# Altium PCB sten_for_works.PcbDoc (part 2 of 2)
Units mm, origin at the board's own origin, x right, y up, seen from the top; angles counter-clockwise.
Board outline 187.3 x 121.8 mm, 2 copper layers (Top Layer, Bottom Layer); 168 components, 126 nets, 634 pads, 474 vias.
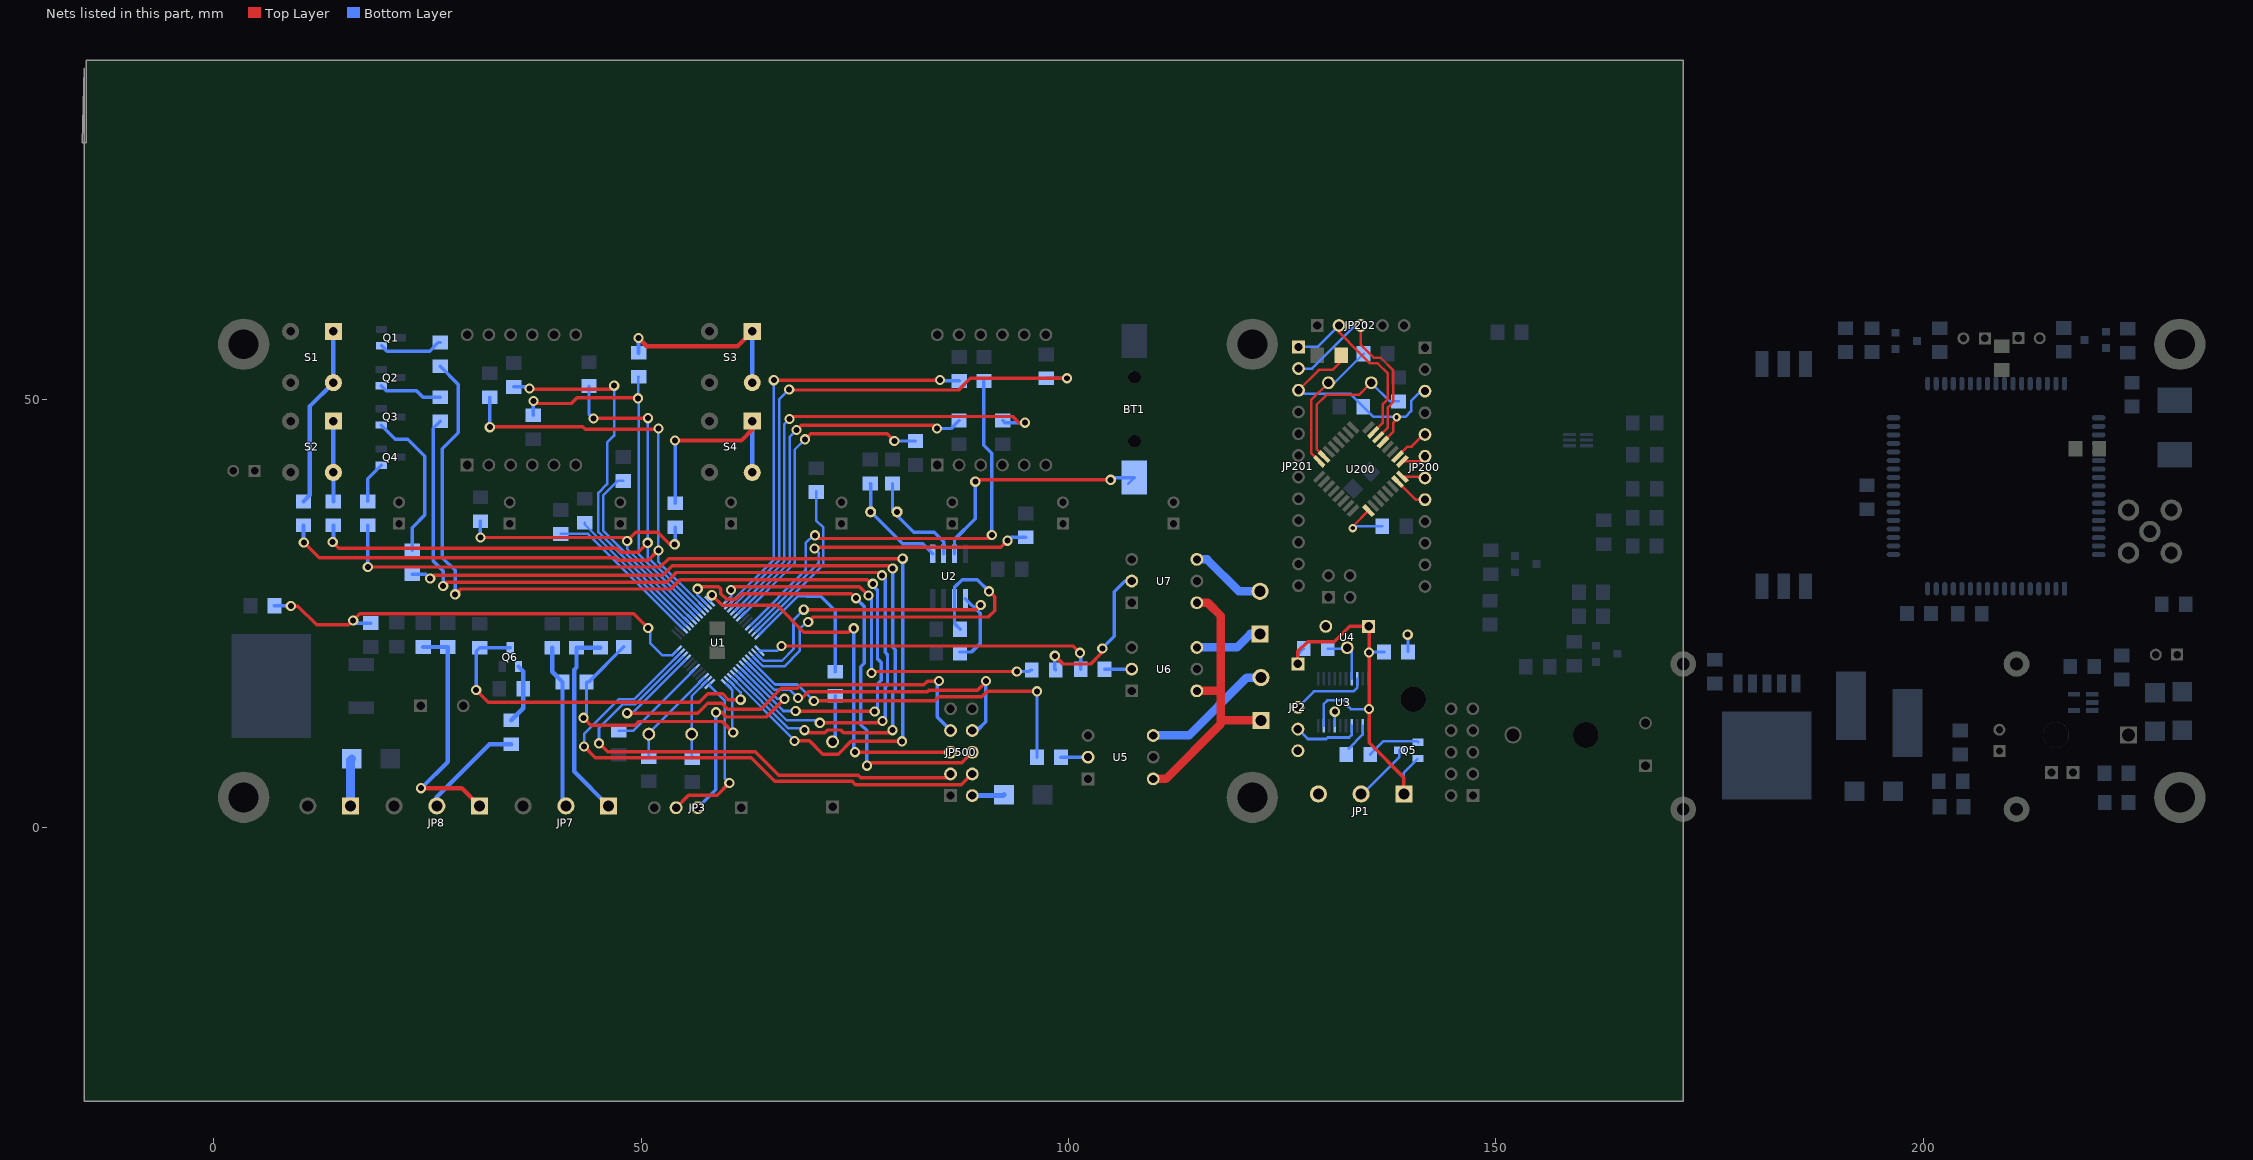
[diagram p2: the nets of this part, all layers, seen from the top]

## Via types
v1: diameter 1.2, hole 0.7, Top Layer to Bottom Layer, 255 vias
v2: diameter 1.1, hole 0.6, Top Layer to Bottom Layer, 197 vias
v3: diameter 1, hole 0.5, Top Layer to Bottom Layer, 19 vias
v4: diameter 1.5, hole 1, Top Layer to Bottom Layer, 3 vias

## Nets (pads, with @x,y where several pads share a name; then routed paths per layer and width w, separated by ;. In a path a pad name is that pad's centre, name@x,y a point inside that pad or via, vN(x,y) a via of type N, cw(c..) or ccw(c..) an arc to the next point about the centre after c; other vN are vias at no path point) (continued)
IO13_: R201.2 U200.17 | length 6.3
  Top Layer w0.3: v3(133.25,35) 133.25,35.197 U200.17@135.092,37.039
  Bottom Layer w0.3: v3(133.25,35) 133.443,35.193 R201.2@136.712,35.193
NetA1_2: A1.2 R39.1 | length 5.5
  Bottom Layer w0.4: A1.2@72.4,10.01 72.693,10.303 R39.1@72.693,15.388
NetBT1_1: BT1.1 U2.3 | length 29.3
  Top Layer w0.4: v1(89.1,40.425) 89.325,40.65 v1(104.925,40.65)
  Bottom Layer w0.3: BT1.1@106.975,40.175 BT1.1@107.7,40.9
  Bottom Layer w0.4: U2.3@86.66,32 86.66,33.66 89.1,36.1 v1(89.1,40.425) ; v1(104.925,40.65) 105.175,40.9 BT1.1@107.7,40.9
NetC1_2: C1.2 U2.1 Y1.1 | length 12.6
  Bottom Layer w0.4: C1.2@76.807,40.212 76.85,40.169 Y1.1@76.85,36.9 80.6,33.15 82.97,33.15 U2.1@84.12,32
NetC2_2: C2.2 U2.2 Y1.2 | length 12.1
  Bottom Layer w0.4: C2.2@79.407,40.212 79.407,36.993 79.95,36.45 81.9,34.5 84.275,34.5 85.39,33.385 U2.2@85.39,32
NetC3_1: C3.1 JP1.1 JP2.1 Q5.2 R23.1 U3.9 U4.1 | length 50
  Top Layer w0.4: JP2.1@126.833,19.108 126.833,20.584 127.974,21.725 131.099,21.725 132.874,23.5 135.424,23.5 135.174,23.25 135.174,9.875 139.225,5.824 JP1.1@139.225,3.899
  Bottom Layer w0.3: JP2.1@126.833,19.108 126.833,20.228 R23.1@127.511,20.907 ; U3.9@129.857,11.857 129.857,14.434 130.274,14.85 132.399,14.85 132.749,14.5 132.749,14.1 133.024,13.825 v1(135.149,13.825) ; JP1.1@139.225,3.899 139.225,6.4 Q5.2@140.8,7.975
  Bottom Layer w0.4: v1(135.149,20.45) 135.205,20.507 C3.1@136.911,20.507
NetC3_2: C3.2 JP1.3 JP2.5 U3.7 U4.3 | length 3.7
  Bottom Layer w0.3: v1(131.149,13.525) 131.157,13.516 U3.7@131.157,11.857 ; v1(139.674,22.525) 139.711,22.487 C3.2@139.711,20.507
NetC10_1: C10.1 JP7.1 R28.1 | length 23.1
  Bottom Layer w0.5: C10.1@45.243,21.013 R28.1@42.443,21.013 42.443,18.693 42.175,18.425 42.175,6.525 JP7.1@46.201,2.499
NetC11_1: C11.1 JP8.1 R31.1 | length 28.5
  Top Layer w0.5: v1(24.25,4.575) 29.025,4.575 JP8.1@31.101,2.499
  Bottom Layer w0.5: v1(24.25,4.575) 24.3,4.575 27.393,7.668 R31.1@27.393,21.088 C11.1@24.493,21.088
NetC14_2: C14.2 U1.6 | length 11.9
  Bottom Layer w0.3: C14.2@47.393,11.288 49.041,11.288 U1.6@56.278,18.524
NetD1_1: D1.1 JP4.1 | length 5.5
  Bottom Layer w1: JP4.1@16.006,2.508 16.006,7.857 D1.1@16.148,7.999
NetD3_1: D3.1 JP500.2 | length 3.8
  Bottom Layer w0.6: JP500.2@88.74,3.7 92.35,3.7 D3.1@92.45,3.8
NetJP1_2: JP1.2 Q5.3 | length 7.3
  Bottom Layer w0.3: JP1.2@134.426,4.1 JP1.2@134.225,3.899 134.399,3.899 138.702,8.202 Q5.3@138.702,8.998
NetJP2_3: JP2.3 U3.18 | length 8.9
  Bottom Layer w0.3: JP2.3@126.833,14.028 128.705,15.9 133.357,15.9 133.757,16.3 U3.18@133.757,17.357
NetJP2_4: JP2.4 U3.4 | length 8
  Bottom Layer w0.3: JP2.4@126.833,11.488 127.996,10.325 130.149,10.325 130.324,10.5 132.824,10.5 133.107,10.784 U3.4@133.107,11.857
NetJP5_1: JP5.1 U5.6 U6.6 U7.6 | length 34.2
  Top Layer w1: U5.6@109.91,5.66 111.385,5.66 117.825,12.1 117.825,24.725 116.29,26.26 U7.6@115.01,26.26 ; U6.6@115.01,15.96 117.76,15.96 117.825,16.025 ; 117.825,12.425 117.906,12.506 JP5.1@122.508,12.506
NetJP5_2: JP5.2 U5.4 | length 15.4
  Bottom Layer w1: U5.4@109.91,10.74 114.09,10.74 120.856,17.506 JP5.2@122.508,17.506
NetJP6_1: JP6.1 U6.4 | length 8
  Bottom Layer w1: U6.4@115.01,21.04 119.715,21.04 121.281,22.606 JP6.1@122.408,22.606
NetJP6_2: JP6.2 U7.4 | length 8.9
  Bottom Layer w1: U7.4@115.01,31.34 116.199,31.34 119.933,27.606 JP6.2@122.408,27.606
NetJP7_2: JP7.2 R29.2 R32.2 | length 19.2
  Bottom Layer w0.5: R29.2@39.607,21.012 39.607,18.199 R32.2@40.812,16.993 40.812,2.888 JP7.2@41.201,2.499
NetJP8_2: JP8.2 R33.2 | length 12.3
  Bottom Layer w0.5: JP8.2@26.101,2.499 26.101,3.551 32.262,9.712 R33.2@34.807,9.712
NetQ1_1: Q1.1 R1.1 | length 7.5
  Bottom Layer w0.4: Q1.1@19.648,56.326 20.273,55.7 25.275,55.7 26.287,56.712 R1.1@26.507,56.712
NetQ2_1: Q2.1 R2.1 | length 7.5
  Bottom Layer w0.4: Q2.1@19.606,51.652 20.182,51.075 23.725,51.075 24.488,50.312 R2.1@26.507,50.312
NetQ3_1: Q3.1 R3.1 | length 18.2
  Bottom Layer w0.4: Q3.1@19.598,47.052 21.249,45.4 22.725,45.4 24.7,43.425 24.7,36.525 23.207,35.032 R3.1@23.207,32.412
NetQ4_1: Q4.1 R4.1 | length 4.9
  Bottom Layer w0.4: R4.1@18.007,38.112 18.007,40.76 Q4.1@19.598,42.352
NetQ5_1: Q5.1 R24.2 | length 6.3
  Bottom Layer w0.3: R24.2@135.288,8.507 136.856,10.075 140.776,10.075 Q5.1@140.902,9.948
NetQ6_1: Q6.1 R33.1 R34.1 | length 7.1
  Bottom Layer w0.5: R33.1@34.807,12.512 36.212,13.918 36.212,18.234 Q6.1@35.648,18.798
NetR23_2: R23.2 U3.17 U4.2 | length 6.4
  Bottom Layer w0.3: R23.2@130.311,20.907 132.83,20.907 132.924,21 133.107,20.816 U3.17@133.107,17.357
NetR24_1: R24.1 U3.2 | length 3.3
  Bottom Layer w0.3: R24.1@132.786,9.212 134.407,10.834 U3.2@134.407,11.857
NetR25_1: R25.1 U5.2 | length 3.2
  Bottom Layer w0.4: R25.1@99.112,8.193 102.283,8.193 U5.2@102.29,8.2
NetR26_1: R26.1 U6.2 | length 3.2
  Bottom Layer w0.4: R26.1@104.212,18.493 107.383,18.493 U6.2@107.39,18.5
NetR27_1: R27.1 U7.2 | length 18.4
  Top Layer w0.4: v1(98.4,20.05) 99.35,19.1 102.575,19.1 103.95,20.475 v1(103.95,20.925)
  Bottom Layer w0.4: v1(98.4,20.05) 98.4,18.506 R27.1@98.512,18.393 ; v1(103.95,20.925) 105.35,22.325 105.35,27.55 106.6,28.8 U7.2@107.39,28.8
NetR35_1: R35.1 S1.1 | length 21.3
  Bottom Layer w0.5: R35.1@10.507,38.112 11.225,38.831 11.225,49.235 S1.1@13.999,52.009 S1.1@13.999,58.009
NetR36_1: R36.1 S2.1 | length 9.4
  Bottom Layer w0.5: S2.1@13.999,47.509 S2.1@13.999,41.509 14.007,41.501 R36.1@14.007,38.112
NetR37_1: R37.1 S3.1 | length 22.1
  Top Layer w0.5: v1(49.707,57.232) 50.663,56.275 61.265,56.275 S3.1@62.999,58.009
  Bottom Layer w0.5: R37.1@49.707,55.512 v1(49.707,57.232) ; S3.1@62.999,52.009 S3.1@62.999,58.009
NetR38_1: R38.1 S4.1 | length 23.9
  Top Layer w0.5: v1(53.975,45.25) 61.725,45.25 62.999,46.524 S4.1@62.999,47.509
  Bottom Layer w0.4: v1(53.975,45.25) 54.007,45.218 R38.1@54.007,37.912
  Bottom Layer w0.5: S4.1@62.999,41.509 S4.1@62.999,47.509
PA3: JP500.7 U1.9 | length 54.6
  Top Layer w0.4: v1(48.375,13.35) 56.625,13.35 57.8,14.525 59.45,14.525 60.15,13.825 63.975,13.825 66.4,16.25 68.275,16.25 68.699,16.674 83.074,16.674 83.5,17.1 v1(84.85,17.1)
  Bottom Layer w0.3: v1(48.375,13.35) 48.982,13.35 U1.9@55.217,19.585
  Bottom Layer w0.4: v1(84.85,17.1) 84.625,16.875 84.625,12.895 JP500.7@86.2,11.32
PA4: JP500.3 U1.10 | length 58
  Top Layer w0.4: v1(45.075,9.825) 46.075,8.825 63.375,8.825 64.996,7.204 66.125,6.075 75.4,6.075 75.7,5.775 85.735,5.775 JP500.3@86.2,6.24
  Bottom Layer w0.3: v1(45.075,9.825) 45.075,11.6 47.85,14.375 49.3,14.375 U1.10@54.863,19.938
PA5: JP500.4 U1.11 | length 64.3
  Top Layer w0.4: v1(43.325,9.45) 44.65,8.125 62.9,8.125 65.65,5.375 74.675,5.375 75.075,4.975 87.475,4.975 JP500.4@88.74,6.24
  Bottom Layer w0.3: v1(43.325,9.45) 43.325,10.925 47.4,15 49.218,15 U1.11@54.51,20.292
PA6: D4.2 R40.2 U1.12 | length 53.8
  Top Layer w0.4: v1(9.025,25.875) 9.85,25.875 12.05,23.675 15.8,23.675 17.1,24.975 49.15,24.975 v1(50.825,23.3)
  Bottom Layer w0.3: v1(50.825,23.3) 51.05,23.075 51.05,21.575 52.525,20.1 53.611,20.1 U1.12@54.156,20.645
  Bottom Layer w0.4: D4.2@7.105,25.891 9.009,25.891 v1(9.025,25.875) ; v1(16.325,24.2) 16.637,23.888 R40.2@18.393,23.888
PB0: R5.2 R35.2 U1.22 | length 91.3
  Top Layer w0.4: v1(10.55,33.325) 12.35,31.525 47,31.525 47.275,31.25 50.85,31.25 51.975,32.375 v1(52.025,32.375) ; v1(32.307,46.807) 32.375,46.875 43.175,46.875 43.475,46.575 51.95,46.575 v1(52.025,46.65)
  Bottom Layer w0.3: v1(52.025,46.65) 52.025,31.05 U1.22@57.338,25.737
  Bottom Layer w0.4: v1(32.307,46.807) R5.2@32.307,50.312
  Bottom Layer w0.5: R35.2@10.507,35.312 10.507,33.368 v1(10.55,33.325)
PB1: R6.2 R36.2 U1.21 | length 75.2
  Top Layer w0.4: v1(13.925,33.375) 14.65,32.65 47.125,32.65 47.625,32.15 49.65,32.15 v1(50.775,33.275) ; v1(44.425,47.825) 50.775,47.825 v1(50.8,47.85)
  Bottom Layer w0.3: v1(50.8,47.85) 50.8,31.568 U1.21@56.985,25.383
  Bottom Layer w0.4: R6.2@43.907,51.612 43.907,48.343 v1(44.425,47.825)
  Bottom Layer w0.5: v1(13.925,33.375) 14.007,33.457 R36.2@14.007,35.312
PB2: R7.2 R37.2 U1.20 | length 45
  Top Layer w0.4: v1(37.425,49.875) 37.725,49.575 41.825,49.575 42.5,50.25 49.575,50.25 v1(49.65,50.175)
  Bottom Layer w0.3: R37.2@49.707,52.712 49.65,52.656 v1(49.65,50.175) 49.7,50.125 49.7,31.961 U1.20@56.631,25.029
  Bottom Layer w0.4: R7.2@37.393,48.188 37.393,49.843 v1(37.425,49.875)
PB3: R8.2 R38.2 U1.19 | length 39.9
  Top Layer w0.4: v1(31.225,33.9) 47.975,33.9 v1(48.375,33.5) 49.375,34.5 51.95,34.5 53.35,33.1 v1(53.925,33.1)
  Bottom Layer w0.3: v1(48.375,33.5) 48.375,32.579 U1.19@56.278,24.676
  Bottom Layer w0.4: R8.2@31.207,35.812 31.207,33.918 v1(31.225,33.9) ; v1(53.925,33.1) 54.007,33.182 R38.2@54.007,35.112
PB4: R9.2 U1.18 | length 21.9
  Bottom Layer w0.3: R9.2@47.907,40.512 47.237,40.512 45.55,38.825 45.55,34.696 U1.18@55.924,24.322
PB5: R10.2 U1.17 | length 44.8
  Top Layer w0.4: v1(36.95,51.325) 37.025,51.25 46.45,51.25 v1(46.85,51.65)
  Bottom Layer w0.3: v1(46.85,51.65) 46.85,45.825 46.025,45 46.025,40.15 45,39.125 45,34.539 U1.17@55.571,23.969
  Bottom Layer w0.4: R10.2@35.107,51.512 36.763,51.512 v1(36.95,51.325)
PB6: R11.2 U1.16 | length 16.9
  Bottom Layer w0.3: R11.2@43.407,35.612 43.407,35.426 U1.16@55.217,23.615
PB7: R12.2 U1.15 | length 18.8
  Bottom Layer w0.3: R12.2@40.607,34.312 43.813,34.312 U1.15@54.863,23.262
PC0: R13.2 U1.26 | length 50.1
  Top Layer w0.4: v1(65.525,52.3) 84.95,52.3 v1(84.975,52.325)
  Bottom Layer w0.3: U1.26@60.308,26.09 65.525,31.307 v1(65.525,52.3) ; v1(84.975,52.325) v1@85.088,52.212
  Bottom Layer w0.4: v1@85.088,52.212 R13.2@87.207,52.212
PC0A: JP200.8 U200.23 | length 4.3
  Top Layer w0.3: U200.23@138.486,40.433 140.6,38.32 JP200.8@141.9,38.32
PC1: R14.2 U1.27 | length 63.7
  Top Layer w0.4: v1(67.325,51.2) 67.375,51.15 87.15,51.15 88.525,52.525 v1(99.825,52.525)
  Bottom Layer w0.3: U1.27@60.662,25.737 66.15,31.225 66.15,50.025 v1(67.325,51.2)
  Bottom Layer w0.4: R14.2@97.407,52.512 97.419,52.525 v1(99.825,52.525)
PC1A: JP200.7 U200.24 | length 2.9
  Top Layer w0.3: U200.24@139.052,40.999 141.761,40.999 JP200.7@141.9,40.86
PC2: R17.2 U1.28 | length 55.7
  Top Layer w0.4: v1(67.35,47.75) 67.65,48.05 93.475,48.05 94.2,47.325 v1(94.9,47.325)
  Bottom Layer w0.3: U1.28@61.015,25.383 66.75,31.118 66.75,47.15 v1(67.35,47.75)
  Bottom Layer w0.4: R17.2@92.293,47.588 92.556,47.325 v1(94.9,47.325)
PC2A: JP200.6 U200.25 | length 3.1
  Top Layer w0.3: U200.25@139.052,42.802 141.302,42.802 JP200.6@141.9,43.4
PC3: R18.2 U1.29 | length 44.1
  Top Layer w0.4: v1(68.175,46.475) 68.725,47.025 84.25,47.025 v1(84.625,46.65)
  Bottom Layer w0.3: U1.29@61.369,25.029 67.4,31.061 67.4,45.7 v1(68.175,46.475)
  Bottom Layer w0.4: v1(84.625,46.65) 86.256,46.65 R18.2@87.193,47.588
PC3A: JP200.5 U200.26 | length 4.5
  Top Layer w0.3: U200.26@138.486,43.368 139.643,44.525 140.125,44.525 141.54,45.94 JP200.5@141.9,45.94
PC4: R19.2 U1.30 | length 37.3
  Top Layer w0.4: v1(69.175,45.375) 69.825,46.025 78.775,46.025 v1(79.625,45.175)
  Bottom Layer w0.3: U1.30@61.722,24.676 67.975,30.929 67.975,44.175 v1(69.175,45.375)
  Bottom Layer w0.4: v1(79.625,45.175) 79.638,45.188 R19.2@82.093,45.188
PC5: R20.2 U1.33 | length 53.2
  Top Layer w0.4: v1(70.35,34.15) 70.725,33.775 90.6,33.775 v1(91.025,34.2)
  Bottom Layer w0.3: U1.33@62.783,23.615 69.25,30.082 69.25,33.25 70.15,34.15 v1(70.35,34.15)
  Bottom Layer w0.4: R20.2@90.107,52.212 90.107,44.693 91.025,43.775 v1(91.025,34.2)
PC6: R21.2 U1.34 | length 38
  Top Layer w0.4: v1(70.275,32.6) 70.425,32.75 92.075,32.75 v1(92.85,33.525)
  Bottom Layer w0.3: U1.34@63.137,23.262 70.775,30.9 70.775,32.1 v1(70.275,32.6)
  Bottom Layer w0.4: v1(92.85,33.525) 93.237,33.912 R21.2@95.007,33.912
PD0: JP500.8 U1.41 | length 37.3
  Top Layer w0.4: v1(68.36,15.115) 68.79,15.115 69.55,15.875 83.5,15.875 83.65,16.025 89.35,16.025 90.35,17.025 v1(90.35,17.1)
  Bottom Layer w0.3: U1.41@62.429,19.231 65.561,16.1 67.375,16.1 v1(68.36,15.115)
  Bottom Layer w0.4: JP500.8@88.74,11.32 89.295,11.32 90.325,12.35 90.325,17.075 v1(90.35,17.1)
PD1: JP3.3 U1.42 | length 27.6
  Top Layer w0.4: v1@58.825,13.525 v1(58.75,13.45) 59.425,13.45 59.975,12.9 64.65,12.9 v1(66.775,15.025)
  Bottom Layer w0.3: U1.42@62.076,18.878 65.929,15.025 v1(66.775,15.025)
  Bottom Layer w0.4: JP3.3@56.628,2.291 58.75,4.413 v1(58.75,13.45)
PD2: R1.2 U1.43 | length 111.9
  Top Layer w0.4: v1(28.25,27.25) 28.875,27.875 53.475,27.875 54.55,28.95 76.45,28.95 v1@77,28.4 ; v1(68.075,13.6) 68.125,13.55 v1(77.325,13.55)
  Bottom Layer w0.3: U1.43@61.722,18.524 66.646,13.6 v1(68.075,13.6)
  Bottom Layer w0.4: R1.2@26.507,53.912 28.625,51.794 28.625,46.175 26.75,44.3 26.75,31.55 28.25,30.05 v1(28.25,27.25) ; v1@77,28.4 77.65,27.75 77.65,19.7 78.075,19.275 78.075,17.175 77.65,16.75 77.65,13.875 v1(77.325,13.55)
  other v1: 77.1,28.475
PD3: R2.2 U1.44 | length 109.2
  Top Layer w0.4: v1(26.85,28.225) 27.275,28.65 52.975,28.65 54.125,29.8 77.85,29.8 v1(78.175,29.475) ; v1(70.9,12.225) 78.05,12.225 v1(78.25,12.425)
  Bottom Layer w0.3: U1.44@61.369,18.171 67.039,12.5 v1@70.625,12.5
  Bottom Layer w0.4: R2.2@26.507,47.512 25.675,46.681 25.675,31.15 26.85,29.975 v1(26.85,28.225) ; v1@70.625,12.5 v1(70.9,12.225) ; v1(78.175,29.475) 78.55,29.1 78.55,20.45 78.825,20.175 78.825,16.675 78.55,16.4 78.55,12.7 78.275,12.425 v1(78.25,12.425)
PD4: R3.2 U1.45 | length 98
  Top Layer w0.4: v1(25.325,29.1) 25.725,29.5 52.55,29.5 53.65,30.6 79.1,30.6 v1(79.425,30.275) ; v1(69.1,11.35) 69.4,11.05 71.5,11.05 71.825,11.375 73.35,11.375 73.675,11.05 79.1,11.05 v1(79.4,11.35)
  Bottom Layer w0.3: U1.45@61.015,17.817 67.257,11.575 68.875,11.575 v1(69.1,11.35)
  Bottom Layer w0.4: R3.2@23.207,29.612 24.813,29.612 v1(25.325,29.1) ; v1(79.4,11.35) 79.425,11.375 79.425,15.725 79.725,16.025 79.725,20.75 79.425,21.05 v1(79.425,30.275)
PD5: R4.2 U1.46 | length 113.5
  Top Layer w0.4: v1(18.025,30.45) 52.25,30.45 53.225,31.425 v1(80.6,31.425) ; v1@68,10.05 v1(67.95,10.1) 69.7,10.1 71.25,8.55 73.05,8.55 74.55,10.05 v1(80.525,10.05)
  Bottom Layer w0.3: U1.46@60.662,17.463 67.95,10.175 v1(67.95,10.1)
  Bottom Layer w0.4: R4.2@18.007,35.312 18.007,30.468 v1(18.025,30.45) ; v1(80.525,10.05) 80.6,10.125 v1(80.6,31.425)
PD6: Q6.3 R30.2 U1.47 | length 43.7
  Top Layer w0.4: v1(30.7,16.05) 32.125,14.625 56.8,14.625 57.775,15.6 59.525,15.6 60.2,14.925 v1(61.65,14.925)
  Bottom Layer w0.3: U1.47@60.308,17.11 61.65,15.768 v1(61.65,14.925)
  Bottom Layer w0.4: v1(30.7,16.05) 30.7,20.606 R30.2@31.107,21.012 31.121,20.998 Q6.3@34.698,20.998
PD7: D2.2 R32.1 U1.48 | length 35
  Top Layer w0.4: v1(43.275,12.8) 44.125,11.95 49.3,11.95 49.725,12.375 59.475,12.375 v1(60.775,11.075)
  Bottom Layer w0.3: U1.48@59.955,16.756 60.65,16.061 60.65,11.2 v1(60.775,11.075)
  Bottom Layer w0.4: v1(43.275,12.8) 43.612,13.137 R32.1@43.612,16.993 43.889,16.993 D2.2@47.991,21.095
PE0: R25.2 U1.40 | length 43.9
  Top Layer w0.4: v1(70.2,14.775) 70.125,14.775 70.15,14.8 84.35,14.8 84.8,15.25 89.825,15.25 90.475,15.9 v1(96.325,15.9)
  Bottom Layer w0.3: U1.40@62.783,19.585 65.668,16.7 68.275,16.7 v1(70.2,14.775)
  Bottom Layer w0.4: R25.2@96.312,8.193 96.312,15.887 v1(96.325,15.9)
PE1: R15.2 U1.39 U2.6 | length 45.5
  Top Layer w0.4: v1(69.55,24) 70.15,24.6 90.625,24.6 91.35,25.325 91.35,26.95 v1(90.7,27.6)
  Bottom Layer w0.3: U1.39@63.137,19.938 64.25,18.825 66.75,18.825 68.55,20.625 68.55,23.175 69.375,24 v1(69.55,24)
  Bottom Layer w0.4: R15.2@87.313,23.182 86.66,23.834 86.66,28.06 87.575,28.975 89.325,28.975 v1(90.7,27.6)
PE2: R16.2 U1.38 U2.5 | length 40.8
  Top Layer w0.4: v1(69.025,25.45) 89.175,25.45 v1(89.725,26)
  Bottom Layer w0.3: U1.38@63.49,20.292 64.307,19.475 66.45,19.475 67.825,20.85 67.825,24.25 v1(69.025,25.45)
  Bottom Layer w0.4: R16.2@87.275,20.5 88.65,20.5 89.65,21.5 89.65,25.03 U2.5@87.93,26.75 ; 89.219,25.461 89.219,25.494 v1(89.725,26)
PE3: R26.2 U1.37 | length 40
  Top Layer w0.4: v1(66.425,21.2) 100.55,21.2 v1(101.35,20.4)
  Bottom Layer w0.3: U1.37@63.844,20.645 65.87,20.645 v1(66.425,21.2)
  Bottom Layer w0.4: v1(101.35,20.4) 101.412,20.338 R26.2@101.412,18.493
PE5: R27.2 U1.25 | length 46.3
  Top Layer w0.4: v1(60.525,27.75) 60.925,28.15 75.55,28.15 76.45,27.25 v1(76.6,27.1) ; v1(76.95,18.05) 77.125,18.225 v1(93.95,18.225)
  Bottom Layer w0.3: U1.25@59.955,26.444 60.525,27.014 v1(60.525,27.75)
  Bottom Layer w0.4: v1(76.6,27.1) 76.95,26.75 v1(76.95,18.05) ; v1(93.95,18.225) 95.4,18.225 95.568,18.393 R27.2@95.712,18.393
PE6: JP500.5 U1.24 | length 45.7
  Top Layer w0.4: v1(58.275,27.15) 59.475,25.95 65.925,25.95 69.05,22.825 74.3,22.825 v1@75.025,23.55 ; v1@75,8.8 v1(75.02,8.78) JP500.5@86.2,8.78
  Bottom Layer w0.3: U1.24@58.045,26.444 58.275,26.673 v1(58.275,27.15)
  Bottom Layer w0.4: v1(75.02,8.78) 74.875,8.925 74.875,23.4 v1@75.025,23.55
  other v1: 74.875,23.275
PE7: JP500.6 U1.23 | length 55.8
  Top Layer w0.4: v1(56.625,27.9) 56.875,28.15 59.05,28.15 59.325,27.875 59.325,27.325 60,26.65 61.1,26.65 61.775,27.325 74.6,27.325 v1(75.125,26.8) ; v1(76.425,7.2) 76.775,7.55 87.51,7.55 JP500.6@88.74,8.78
  Bottom Layer w0.3: v1(56.625,27.9) 56.55,27.825 56.55,27.232 U1.23@57.692,26.09
  Bottom Layer w0.4: v1(75.125,26.8) 76.1,25.825 76.1,19.2 75.7,18.8 75.7,12 76.375,11.325 76.375,7.25 v1(76.425,7.2)
PG0: R22.2 U1.35 | length 20
  Bottom Layer w0.3: U1.35@63.49,22.908 71.325,30.743 71.325,35.05 70.475,35.9 R22.2@70.475,39.325
PG1: R39.2 U1.36 | length 18.5
  Bottom Layer w0.3: U1.36@63.844,22.555 68.289,27 69.375,27
  Bottom Layer w0.4: 69.375,27 71,27 72.693,25.307 R39.2@72.693,18.188
RESET: C202.1 JP200.3 JP201.3 R200.2 U200.29 | length 29.3
  Top Layer w0.3: JP201.3@126.9,51.12 129.28,53.5 130.875,53.5 131.912,54.537 C202.1@131.912,55.207 ; U200.29@136.789,45.065 137.975,46.251 137.975,47.275 138.325,47.625 138.325,47.9 v3(138.375,47.95)
  Bottom Layer w0.3: JP201.3@126.9,51.12 127.32,50.7 132.994,50.7 135.694,48 139.4,48 140.075,48.675 140.075,49.875 141.22,51.02 JP200.3@141.9,51.02 ; v3(138.375,47.95) 138.375,47.8 138.425,47.85 v3@138.425,48
RST: JP3.4 U1.1 | length 20
  Top Layer w0.4: JP3.4@54.088,2.291 55.547,3.75 58.9,3.75 v1(60.325,5.175)
  Bottom Layer w0.3: U1.1@58.045,16.756 58.045,16.505 59.8,14.75 59.8,5.7 v1(60.325,5.175)
RX: JP201.2 JP202.3 U200.30 | length 25.3
  Top Layer w0.3: JP202.3@134.18,58.7 134.18,56.47 135.35,55.3 135.725,54.925 136.525,54.925 138,53.45 138,49.775 137.35,49.125 137.35,46.757 U200.30@136.223,45.631
  Bottom Layer w0.3: JP201.2@126.9,53.66 128.485,53.66 133.475,58.65 JP202.3@134.3,58.65
TX: JP201.1 JP202.2 U200.31 | length 21.9
  Top Layer w0.3: JP202.2@131.64,58.7 131.64,57.91 133.99,55.56 135.275,54.275 136.175,54.275 137.35,53.1 137.35,50.075 136.75,49.475 136.75,47.289 U200.31@135.658,46.196
  Bottom Layer w0.3: JP201.1@126.9,56.2 129.14,56.2 JP202.2@131.64,58.7
XL1: C201.2 U200.7 Y200.2 | length 18
  Top Layer w0.3: U200.7@129.895,43.368 129.025,44.238 129.025,49.425 130.175,50.575 133.983,50.575 Y200.2@135.408,52
  Bottom Layer w0.3: Y200.2@135.408,52 137.596,49.812 C201.2@138.607,49.812
XL2: C200.2 U200.8 Y200.1 | length 15.9
  Top Layer w0.3: U200.8@129.329,42.802 128.375,43.756 128.375,49.967 Y200.1@130.408,52
  Bottom Layer w0.3: Y200.1@130.408,52 131.119,52 C200.2@134.512,55.393
XT1: C13.2 U1.2 Y2.2 | length 9.8
  Bottom Layer w0.3: C13.2@55.993,8.088 55.908,8.173 55.908,15.326 U1.2@57.692,17.11
XT2: C12.2 U1.3 Y2.1 | length 12
  Bottom Layer w0.3: C12.2@51.093,8.188 50.908,8.373 50.908,11.033 U1.3@57.338,17.463
pads on no net: B101.0 B101.1 B101.2 BT1.0 C1_1.1 C1_1.2 C102.1 C102.2 C103.1 C103.2 C104.1 C104.2 C105.1 C105.2 C106.1 C106.2 C107.1 C107.2 C108.1 C108.2 C109.1 C109.2 C110.1 C110.2 C111.1 C111.2 C112.1 C112.2 C113.1 C113.2 D100.1 D100.2 D102.1 D102.2 D104.1 D104.2 D105.1 D105.2 DS1_1.1 DS1_1.2 DS2_1.1 DS2_1.2 DS103.1 DS103.2 HG1.6 JP1.0 JP7.0 JP8.0 JP100.1 JP100.2 JP100.3 JP100.4 JP100.5 JP100.6 JP100.7 JP100.8 JP100.9 JP100.10 L101.1 L101.2 P1.1 P1.2 Q1_1.1 Q1_1.2 Q1_1.3 Q2_1.1 Q2_1.2 Q2_1.3 Q103.1 Q103.2 Q103.3 Q104.1 Q104.2 Q104.3 R4_1.1 R4_1.2 R5_1.1 R5_1.2 R6_1.1 R6_1.2 R7_1.1 R7_1.2 R10_1.1 R10_1.2 R11_1.1 R11_1.2 R101.1 R101.2 R102.1 R102.2 R103.1 R103.2 R108.1 R108.2 R109.1 R109.2 R112.1 R112.2 R113.1 R113.2 R114.1 R114.2 R115.1 R115.2 R116.1 R116.2 R117.1 R117.2 R118.1 R118.2 R119.1 R119.2 R120.1 R120.2 R121.1 R121.2 R122.1 R122.2 U2.7 U3.1 U3.3 U3.5 U3.6 U3.8 U3.10 U3.11 U3.12 U3.13 U3.14 U3.15 U3.16 U3.19 U3.20 U5.3 U5.5 U6.3 U6.5 U7.3 U7.5 U101.1 U101.2 U101.3 U101.4 U101.5 U101.6 U101.7 U101.8 U101.9 U101.10 U101.11 U101.12 U101.13 U101.14 U101.15 U101.16 U101.17 U101.18 U101.19 U101.20 U101.21 U101.22 U101.23 U101.24 U101.25 U101.26 U101.27 U101.28 U101.29 U101.30 U101.31 U101.32 U101.33 U101.34 U101.35 U101.36 U101.37 U101.38 U101.39 U101.40 U101.41 U101.42 U101.43 U101.44 U101.45 U101.46 U101.47 U101.48 U101.49 U101.50 U101.51 U101.52 U101.53 U101.54 U101.55 U101.56 U101.57 U101.58 U101.59 U101.60 U101.61 U101.62 U101.63 U101.64 U101.65 U101.66 U101.67 U101.68 U102.2 U102.3 U102.4 U102.5 U102.6 U102.7 U103.1 U103.2 U103.3 U103.4 U103.5 U104.1 U104.2 U104.3 U104.4 U104.5 U104.6 U105.1 U105.2 U105.3 U105.4 U200.20 VD101.1 VD101.2 VD101.3 VD101.4 VD101.5 VD101.6 X101.1 X102.1
copper on no net: | length 1423.8
  Top Layer w0.4: 147.3,11.32 148.65,12.67 v2(148.65,21.75) ; v2(150.25,13.65) v2(150.25,55.7) ; v2(155.025,8.7) 155.225,8.9 v2(155.225,55.625) ; v2(156.45,6.2) v2(156.45,24.725) ; v2(157.25,27.475) 157.725,27 157.725,23.975 157.5,23.75 157.5,7.025 v2(158.175,6.35) ; v2@158.475,43.025 158.475,42.225 159.475,41.225 v2(159.475,33.15) ; v2@161.225,29.7 161.225,48.225 v2(161.35,48.35) ; v2(167.375,21.45) 167.775,21.85 v2(167.775,28.025) ; v2(180.9,44.5) 181.075,44.675 v2(181.075,51.425) ; v2(183.6,48.125) 183.607,48.132 183.607,51.357 v2(183.66,51.41) ; v2(186.3,51.375) 186.3,33.95 v2(186.575,33.675) ; v2(188.937,58.388) 188.937,49.863 190.2,48.6 190.2,38.2 191.925,36.475 191.925,22.675 v2(191.275,22.025) ; v2(190.9,51.65) 190.9,52.825 193.875,55.8 196.6,55.8 v2(199.187,58.388) ; v2(192.275,51.025) 192.275,53.025 194.325,55.075 v2(198.975,55.075) ; v2(193.1,26.8) 193.725,26.175 v2(193.725,22.875) ; v2@221.675,33.875 221.725,33.825 221.725,22.35 v2(221.825,22.25) ; v2(222.4,58.275) 222.4,54.6 v2(226.2,50.8) ; v2@229.287,9.712 228.775,10.225 228.775,19.278 229.689,20.192
  Top Layer w0.6: 144.76,3.7 144.76,2.69 145.975,1.475 152,1.475 153.4,2.875 153.4,9.225 154.075,9.9 154.075,12.3 153.6,12.775 v2(153.6,57.525) ; v2(183.45,18.925) 189.5,18.925 190.8,17.625 190.8,2.3 v2(190.125,1.7) ; 209.182,56.288 v2@209.182,57.182 ; 220.588,44.293 222.293,44.293 222.925,44.925 222.925,52.9 221.85,53.975 v2(221.525,53.975)
  Bottom Layer w0.4: 144.76,6.24 146.02,7.5 157.025,7.5 v2(158.175,6.35) ; 144.76,8.78 146.03,10.05 148.775,10.05 150.25,11.525 v2(150.25,13.65) ; 144.76,11.32 146.05,12.61 146.05,17.868 146.975,18.793 153.487,18.793 ; 147.3,6.24 156.41,6.24 v2(156.45,6.2) ; 147.3,8.78 154.945,8.78 v2(155.025,8.7) ; v2(148.65,21.75) 149.307,22.407 149.307,23.712 ; 149.307,26.512 149.307,29.432 149.717,29.842 152.239,29.842 ; v2@150.25,55.75 153.125,55.75 154.475,54.4 155.975,54.4 156.175,54.6 171.4,54.6 176.75,49.25 190.5,49.25 v2(192.275,51.025) ; 154.739,30.792 163.508,30.792 166.275,28.025 v2(167.775,28.025) ; v2(155.225,55.625) 171.8,55.625 177.4,50.025 189.275,50.025 v2(190.9,51.65) ; 156.287,18.793 159.074,18.793 159.168,18.888 161.26,18.888 161.714,19.342 ; v2(156.45,24.725) 156.482,24.693 159.712,24.693 ; 156.675,45.4 156.775,45.3 158.6,45.3 ; v2(157.25,27.475) 159.694,27.475 159.712,27.493 ; v2(158.475,43) 158.475,44.625 ; 158.6,45.95 158.6,47.225 159.725,48.35 v2(161.35,48.35) ; v2(159.475,33.15) 162.35,33.15 162.593,32.907 165.988,32.907 165.95,32.869 165.95,31.625 166.725,30.85 173.375,30.85 176.2,33.675 v2(186.575,33.675) ; 160.6,44.65 161.3,44.65 162.357,43.593 166.012,43.593 166.012,42.663 166.775,41.9 170.05,41.9 171.025,42.875 171.025,43.3 172.225,44.5 v2(180.9,44.5) ; 160.6,45.95 161.5,45.95 162.843,47.293 166.012,47.293 166.012,48.912 166.65,49.55 170.2,49.55 171.9,47.85 183.25,47.85 183.5,48.1 183.575,48.1 v2(183.6,48.125) ; v2(161.15,29.7) 163.25,29.7 166.425,26.525 180.7,26.525 181.12,26.945 181.12,28.2 ; v2(161.225,39.55) 161.268,39.593 166.012,39.593 ; 162.512,24.693 162.594,24.775 193.3,24.775 194.705,23.37 196.725,21.35 206.425,21.35 208.5,23.425 208.5,27.9 ; 162.512,27.493 163.707,27.493 165.7,25.5 193.625,25.5 196.925,22.2 205.6,22.2 206.65,23.25 206.65,24.831 ; 164.214,20.292 167.922,24 192.6,24 v2(193.725,22.875) ; v2(167.375,21.45) 167.375,22.125 168.425,23.175 191.825,23.175 194.4,20.6 207.1,20.6 209.775,23.275 215.55,23.275 216.5,24.225 216.5,27.9 ; 168.675,43.55 169.275,43.55 171.625,45.9 196.5,45.9 ; 168.788,32.907 168.825,32.944 168.825,39.581 168.812,39.593 171.618,39.593 175.05,43.025 181.9,43.025 183.775,44.9 196.5,44.9 ; 168.812,47.293 169.206,46.9 196.5,46.9 ; 186.2,54.2 186.2,51.475 v2(186.3,51.375) ; v2(186.25,43.55) 186.6,43.9 196.5,43.9 ; v2(188.937,58.388) 190.893,58.388 ; 190.893,55.588 196.385,55.588 196.739,55.942 ; v2(191.275,22.025) 191.875,22.025 194.15,19.75 207.875,19.75 210.3,22.175 221.75,22.175 v2(221.825,22.25) ; v2(193.1,26.8) 193.425,26.8 197.2,23.025 198.906,23.025 200.875,24.994 ; v2(198.975,55.075) 199.35,55.075 200.35,56.075 200.35,56.475 200.85,56.975 203.2,56.975 203.475,57.25 203.475,58.1 204.075,58.7 216.319,58.7 216.607,58.412 217.757,58.412 219.261,56.908 ; 199.125,56.75 199.125,58.325 v2(199.187,58.388) 201.893,58.388 ; 201.893,55.588 203.084,55.588 204.689,57.192 ; 213.611,57.208 215.207,55.612 216.607,55.612 ; 220.5,33.875 v2@221.675,33.875 ; 220.5,47.9 223.094,47.9 224.407,49.212 ; 221.761,57.858 222.215,58.312 223.907,58.312 ; 224.407,52.107 224.407,52.012 224.988,52.012 v2(226.2,50.8)
  Bottom Layer w0.5: v2(181.075,51.425) 181.12,51.47 181.12,54.2 ; 183.4,16.825 183.4,18.975 v2(183.45,18.925) ; v2(183.66,51.41) 183.66,54.2 ; v2(190.125,1.7) 190.05,1.55 201.031,1.55 201.888,2.407 201.888,2.669 204.612,5.393 ; 193.393,39.988 193.481,39.9 196.5,39.9 ; 200.875,24.994 201.5,25.619 201.5,27.9 ; 202.5,27.9 202.5,26.506 204.012,24.993 ; 206.65,24.831 206.812,24.993 207.5,25.681 207.5,27.9 ; 217.188,18.807 217.188,15.987 217.625,15.55 ; 217.625,13.65 217.625,13.5 224.005,7.12 ; 218.8,41.425 219.325,40.9 221.45,40.9 222,41.45 ; 218.85,38.3 219.45,38.9 221.675,38.9 222.1,38.475 ; 219.775,13.65 219.775,13.2 222.175,10.8 223.5,10.8 ; 219.775,15.55 221.456,15.55 223.193,17.288 ; 223.193,20.088 223.298,20.192 227.189,20.192
  Bottom Layer w0.6: v2(153.6,57.525) 187.025,57.525 188.775,55.775 188.775,54.825 190.025,53.575 205.7,53.575 206.1,53.975 v2(221.525,53.975) ; 207.189,57.192 v2@209.16,57.192 ; 209.175,53.975 v2@209.175,57.182 ; v2@209.175,57.192 211.095,57.192 211.111,57.208 ; 220.5,39.9 225.275,39.9 226.5,38.675 226.5,34.6 ; 220.5,42.9 221.875,42.9 222.05,43.075 222.05,44.75 221.9,44.9 220.5,44.9 ; 220.5,43.9 222.05,43.9
  Bottom Layer w1: 180,16.825 180,21.525 180.5,22.025 186.475,22.025 187.125,21.375 187.125,17.95 191.225,13.85 191.825,13.85 191.825,4.25 ; 181.7,16.825 181.7,20.375 181.75,20.425 v4@185.075,20.425 ; v4(185.075,20.35) v4@185.15,20.425 ; 185.1,16.825 v4@185.1,20.35 ; 198.132,12.193 199.032,12.193 202.713,8.512 204.307,8.512 209.188,8.512 210.9,6.8 210.9,2.1 210.593,2.407 204.688,2.407 ; 210.9,6.2 211.112,6.412 215.005,6.412 ; 217.505,6.412 221.383,6.412 221.488,6.307 ; 221.825,44.2 222.175,44.2 v4@222.262,44.287 ; v4@222.55,44 228.85,44 231.4,41.45 231.4,16.547 230.301,15.448 ; 223.5,10.8 226.953,10.8 227.101,10.948 ; 224.005,2.891 224.005,6.307 ; 224.005,7.13 225.675,8.8 228.375,8.8 230.301,10.726 230.301,11.348 ; 227.101,15.448 230.398,15.448
  Bottom Layer w1.5: 147.3,3.7 163.994,3.7 167.493,7.199 169.699,7.199 ; 171.9,2.1 171.9,4.998 169.699,7.199 ; 177.975,16.875 175.975,16.875 175.759,16.659 173.2,14.1 173.2,10.7 169.699,7.199
  other v2: 154.5,1.5 154.5,1.5 158.45,1.5 163.45,1.5 178.5,2.425 168.475,2.5 183.5,2.5 188.5,2.5 219.575,2.5 215,2.525 199.2,3.375 181,4.95 186,4.975 175,5 207.5,5 199.175,6.8 173.5,7.45 188.5,7.45 178.5,7.475 195,7.475 183.45,7.5 161,7.525 220.5,8.35 229.237,9.662 186,9.975 165,10 174.95,10 181,10.025 218.1,10.55 183.5,12.475 178.45,12.5 188.475,12.5 194.975,12.5 202.475,12.5 207.5,12.5 212.5,12.525 225.525,13.3 232.125,13.6 222.1,13.825 151.9,14.925 205,14.975 165.95,15 169.9,15 210,15 215,15 160.95,15.1 160.95,15.1 195,17.225 168.35,17.5 207.5,17.5 202.5,17.525 226.65,18.3 177.9,19.575 215.025,20 218.55,20.9 189.05,21.9 176.05,22 152,22.45 146,22.475 227.475,22.5 164.1,22.675 225,25 220,25.025 210.4,25.15 214.6,25.25 146,27.45 195,27.475 151.925,27.5 190,27.5 172.75,29.2 175.575,29.2 157.6,29.375 189.05,29.4 225,29.975 200,30 230,30 183.6,31.075 186.8,31.15 178.4,31.75 146,32.45 202.5,32.475 194.35,32.5 217.5,32.525 171.9,32.925 157.15,33.6 221.9,33.9 189.1,34.375 148.5,34.95 175,35 180.025,35 199.975,35 215,35 152,37.475 146,37.5 172.025,37.5 177.5,37.5 182.55,37.5 202.45,37.5 163.35,38 157.2,38.725 189.05,39.5 148.425,40 175,40 180,40 184.85,40 200,40.025 205,40.025 210,40.025 163.45,41.4 224.2,41.975 183.375,42.3 193.3,42.325 146,42.475 207.5,42.475 212.5,42.475 151.925,42.5 172.5,42.525 202.5,42.55 148.45,45 200,45 205.025,45 210,45.025 215,45.025 163.5,45.25 225.3,46.525 212.5,47.475 217.5,47.475 145.975,47.5 152.025,47.5 202.525,47.5 207.5,47.525 192.325,48.6 158.475,49.5 163.5,49.55 148.45,50 230.075,50 172.9,51.075 187.8,51.525 195,52.05 221.45,52.1 160.9,52.175 166,52.175 177.5,52.3 145.975,52.5 151.975,52.5 148.45,55 212.55,55.3 205.825,55.5 179,55.525 174.975,55.6 209.16,57.182 146,57.475 175,58.65 170,58.675 185,58.675 180,58.7 164.25,58.8 159.2,58.825 154.8,58.875
  other v4: 181.75,20.325 222.925,44.525

## Polygon pours and split planes (outlines as drawn)
GND on Top Layer (hatched 90Degree grid 0.1 track 0.3, remove dead copper): -2.4,63.325 -2.4,-3.775 127.15,-3.775 127.15,62.95 -2.4,62.95
NetC3_2 on Top Layer (hatched 90Degree grid 0.1 track 0.3, remove dead copper): 144.825,-1.1 124.675,-1.1 124.675,25.45 143.975,25.45 143.975,-1.1
no net on Top Layer (hatched 90Degree grid 0.1 track 0.3, remove dead copper): 235.3,61.45 142.6,61.45 142.6,-0.95 234.5,-0.95 234.5,61.5 234.175,61.5
+5V on Bottom Layer (hatched 90Degree grid 0.1 track 0.3, remove dead copper): 52.925,21.75 59.075,27.9 65.325,21.65 59.075,15.4 52.85,21.625
GND on Bottom Layer (hatched 90Degree grid 0.1 track 0.3, remove dead copper): -3.4,63.175 -3.4,-4.05 126.65,-4.05 126.65,63.175
NetC3_2 on Bottom Layer (hatched 90Degree grid 0.1 track 0.3, remove dead copper): 144.325,-0.875 124.4,-0.875 124.4,25.55 144.275,25.55 144.275,-0.825
no net on Bottom Layer (hatched 90Degree grid 0.1 track 0.3, remove dead copper): 235.825,62.45 141.35,62.45 141.35,-2.85 234.975,-2.85 234.975,62.55 234.875,62.55

## Keep-outs
Keep-Out Layer:
  lines w0.254: 0,-0.025 0.025,0 143.5,0 233.5,0 233.5,60 143.5,60 0,60 0,-0.025

## Text inside footprints (layer, text, board x,y; h text height)
JP100: Top Overlay "2" at 145.268,1.16 h1.27 r90; Top Overlay "1" at 147.808,1.668 h1.27 r90; Top Overlay "9" at 147.808,15.384 h1.27 r90; Top Overlay "10" at 145.268,15.384 h1.27 r90
JP203: Top Overlay "3" at 134.464,26.392 h1.27; Top Overlay "4" at 134.464,28.932 h1.27; Top Overlay "2" at 127.86,28.932 h1.27; Top Overlay "1" at 128.368,26.392 h1.27
JP500: Bottom Overlay "10" at 88.232,15.384 h1 r270; Bottom Overlay "9" at 85.692,15.384 h1 r270; Bottom Overlay "1" at 85.692,1.668 h1 r270; Bottom Overlay "2" at 88.232,1.16 h1 r270
U8: Bottom Overlay "3" at 15.578,14.486 h1 r90; Bottom Overlay "1" at 15.578,19.308 h1 r90
U104: Bottom Overlay "1" at 178.05,15.4 h1 r180; Bottom Overlay "5" at 184.6,15.4 h1 r180